# EAGLE board mbedshield060_P (EAGLE 6.5.0)
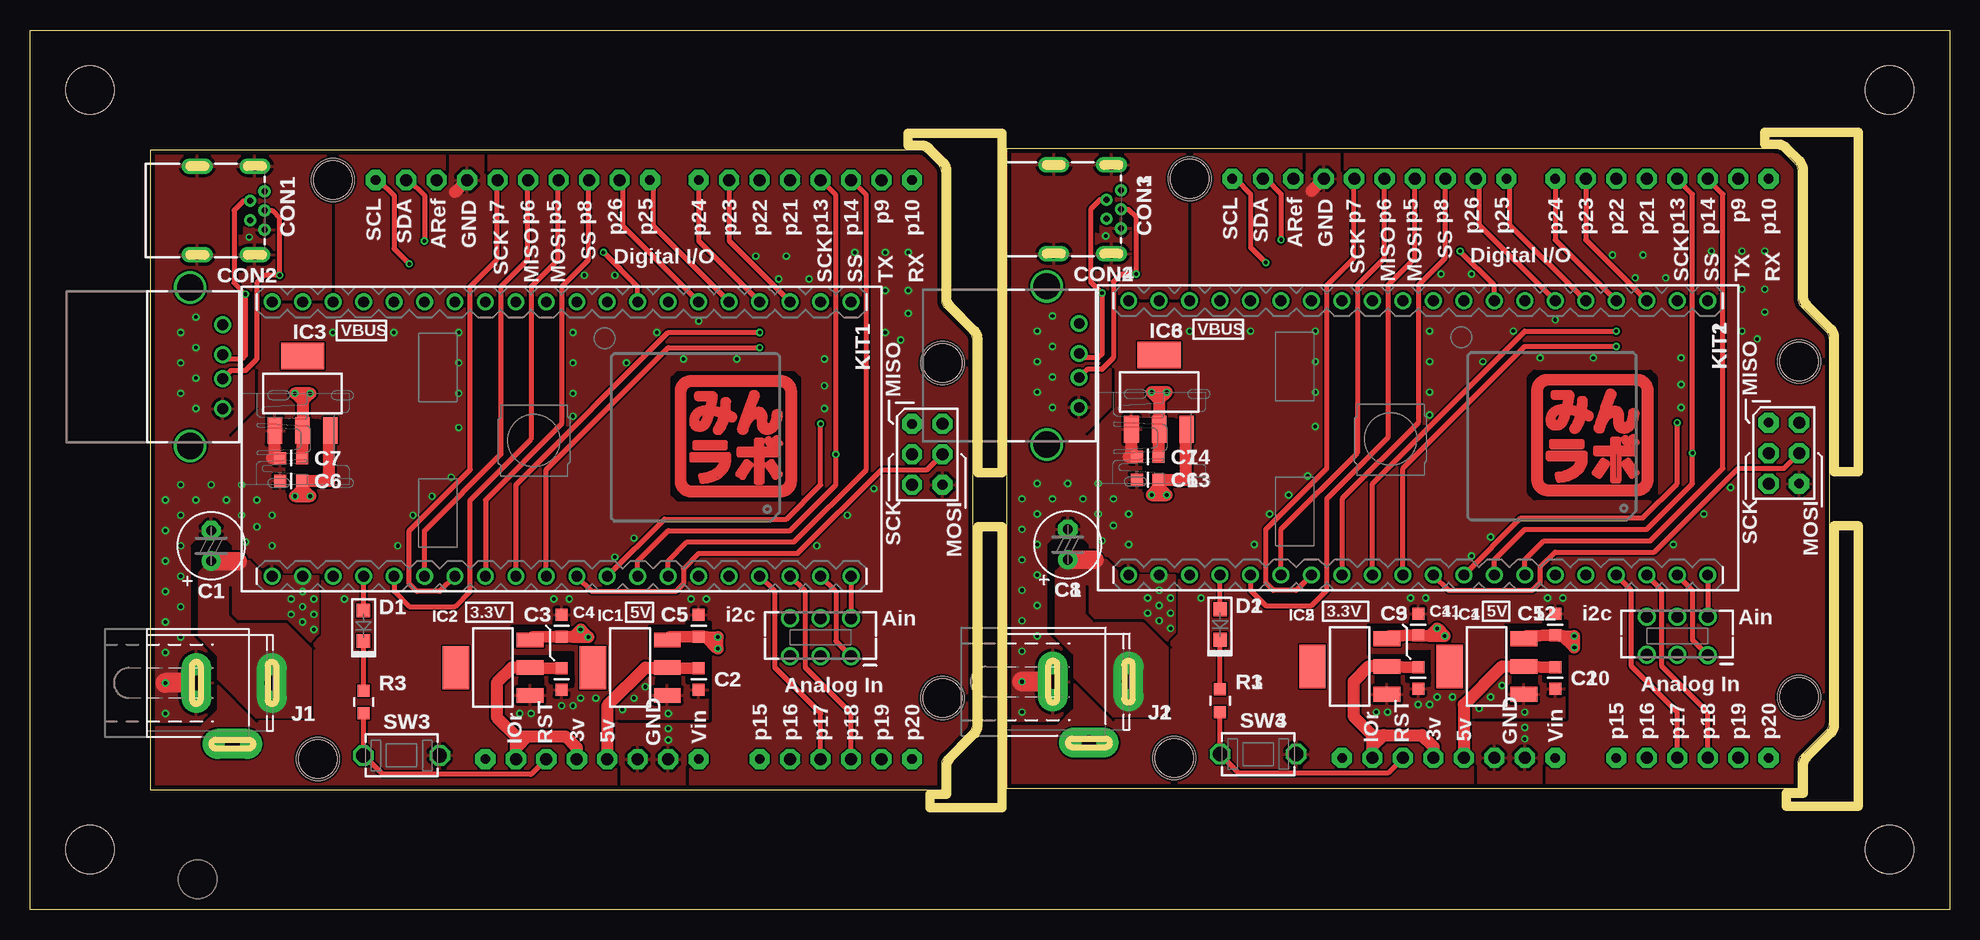
[diagram p0: board, top side]
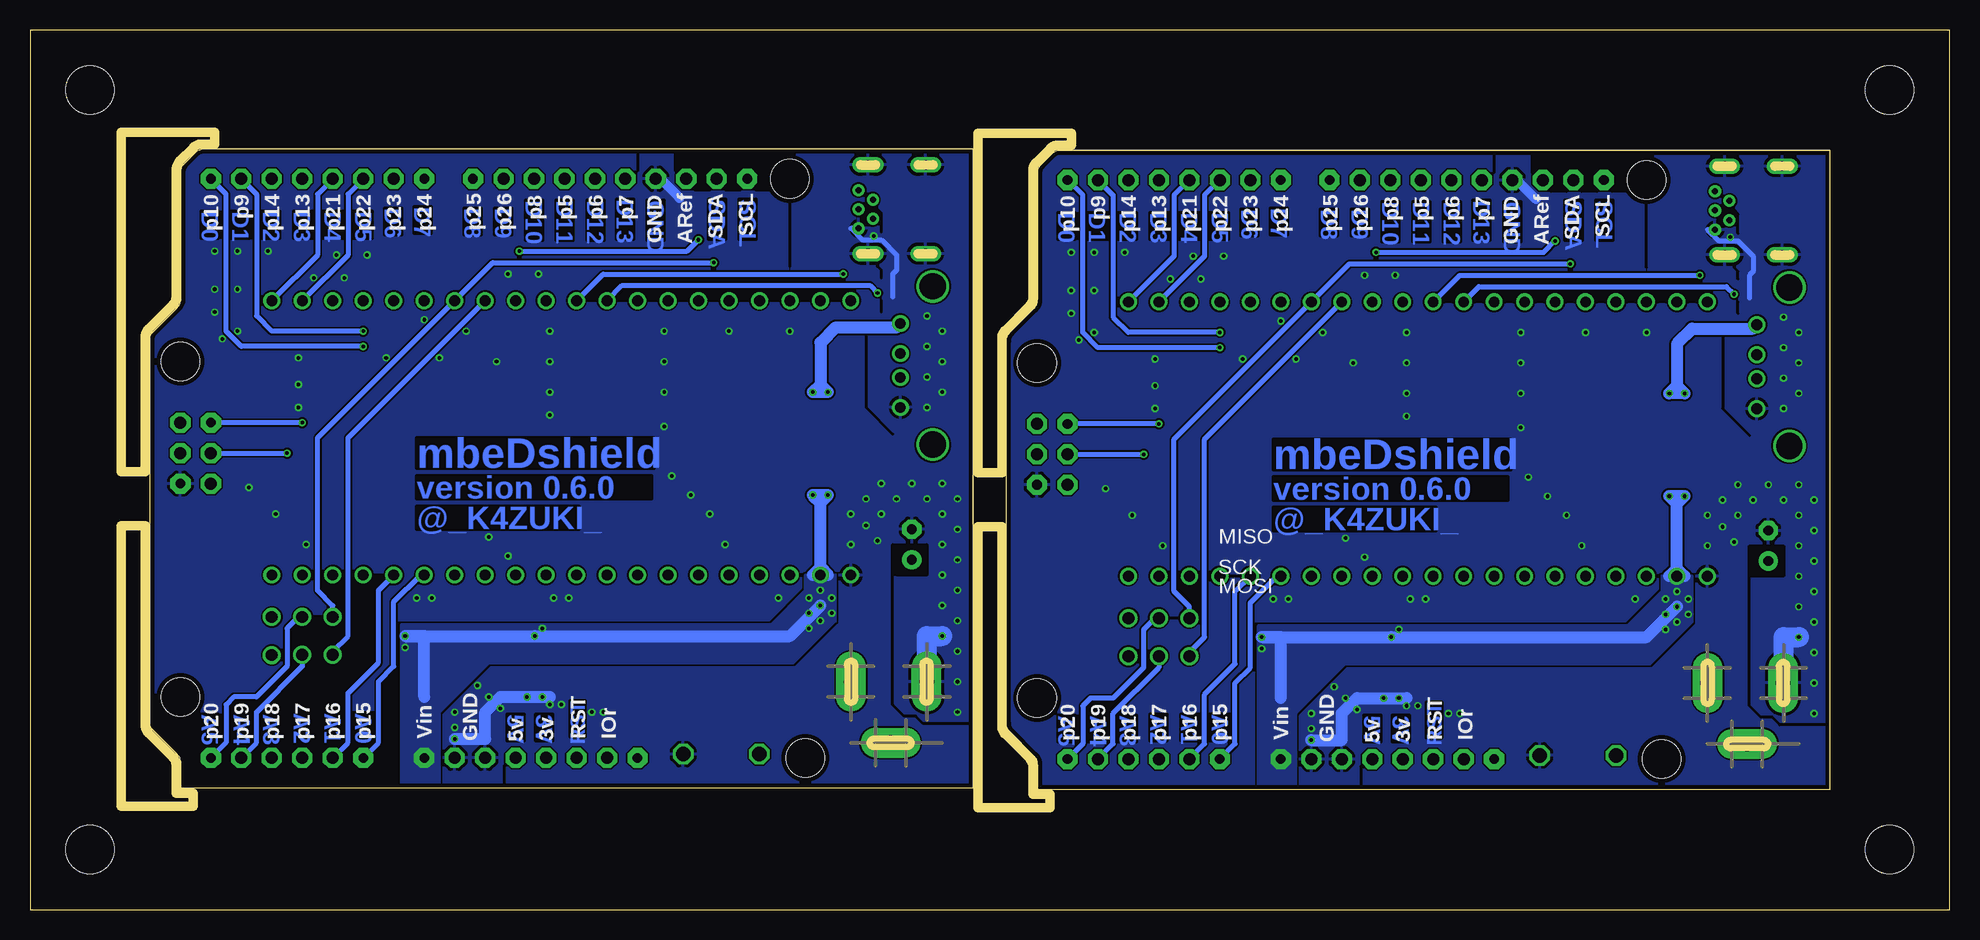
[diagram p1: board, bottom side, seen from below]

Size 160 x 73.3 mm. Coordinates in mm from the lower left corner, seen from the top.
Outline: 0,0 0,73.3 160,73.3 160,0 0,0
Outline: 10,63.3 10,10 76,10 76,12.09 arc-45 76.29,12.79 78.31,14.81 arc45 78.6,15.51 78.6,47.39 arc45 78.31,48.09 76.29,50.11 arc-45 76,50.81 76,61.39 arc45 75.71,62.09 74.79,63.01 arc45 74.09,63.3 10,63.3
Outline: 81.4,63.4 81.4,10.1 147.4,10.1 147.4,12.19 arc-45 147.69,12.89 149.71,14.91 arc45 150,15.61 150,47.49 arc45 149.71,48.19 147.69,50.21 arc-45 147.4,50.91 147.4,61.49 arc45 147.11,62.19 146.19,63.11 arc45 145.49,63.4 81.4,63.4
Copper layers (1*16): Top 0.0356mm / dielectric 1.5011mm / Bottom 0.0356mm
Design rules "default *": minimum track width 0.15mm, minimum drill 0.3mm, track to track 0.15mm, track to pad 0.15mm, pad to pad 0.15mm, via to via 0.15mm, smd to smd 0mil, copper to edge 15mil, drill to drill 8mil, minimum pad ring 10mil, minimum via ring 0.15mm, stop-mask expansion 4mil, vias tented up to drill 100mil, thermal gap 10mil
Net classes: 0 signal: width 0.406 mm, drill 0.3 mm; 1 power: width 0.254 mm, drill 0.3 mm
Holes 3.2 mm at 76.06,45.56 76.06,17.62 23.99,12.54 25.26,60.8 147.46,45.66 147.46,17.72 95.39,12.64 96.66,60.9
Holes 4 mm at 5,68.3 5,5 155,5 155,68.3
tRestrict: area 43.4,18.9 to 45.3,19.5; area 54.8,18.9 to 56.7,19.5; area 40.8,18.9 to 42.7,19.2; area 52.2,18.9 to 54.2,19.2; area 54.8,23.3 to 56.7,24; area 43.7,23.3 to 44.9,24; area 21.4,38.9 to 21.8,40.8; area 23.7,38.9 to 24,40.8; area 21.4,36.7 to 22.1,38.6; area 21.4,34.8 to 22.1,36.7; area 114.8,19 to 116.7,19.6; area 126.2,19 to 128.1,19.6; 8 more areas; 80 lines
bRestrict: 72 lines
Milling: area 75,8.5 to 81,31.9; area 73.2,36.4 to 81,64.7; area 146.4,8.6 to 152.4,32; area 144.6,36.5 to 152.4,64.8

## Footprints (pad centres in the part's own frame; a part is rotated, then mirrored left to right if it is on the bottom)
C_2.5PHI6 = drill 0.813 pad 1.6: + -1.27,0 | drill 0.813 pad 1.6 octagon: - 1.27,0
CR_1608 = smd 1 x 1: 1 -0.9,0; 2 0.9,0
CON_USB_MINIB_AKI = drill 0.5: D+ 0,0; D- -1.2,0.8; GND 0,-1.6; ID -1.2,-0.8; VBUS 0,1.6 | drill 0.8 long: GND@1 -5.6,3.7; GND@2 -0.8,3.7; GND@3 -0.8,-3.7; GND@4 -5.6,-3.7
CON_USB_A_SHIELD = drill 0.9: 1 -3.5,0; 2 -1,0; 3 1,0; 4 3.5,0 | drill 2.2: SHLD -6.6,-2.7; SHLD@1 6.6,-2.7
DIODE_2125 = smd 1.143 x 1.143: A 1.27,0; K -1.27,0
SOT223 = smd 1.219 x 2.235: 1 -2.311,-3.099; 2 0,-3.099; 3 2.311,-3.099 | smd 3.6 x 2.2: 4 0,3.099
CON_DCJACK = drill 1.2 pad 2.5 long: 1 -0.6,0; 2 2.405,-5.08; 3 5.7,0
MBED-KIT = drill 0.9: D+ 11.43,1.27; D- 11.43,3.81; GND -11.43,24.13; IF+ 11.43,16.51; IF- 11.43,19.05; NR -11.43,16.51; P$5 -11.43,13.97; P$6 -11.43,11.43; P$7 -11.43,8.89; P$8 -11.43,6.35; P$9 -11.43,3.81; P$10 -11.43,1.27; P$11 -11.43,-1.27; P$12 -11.43,-3.81; P$13 -11.43,-6.35; P$14 -11.43,-8.89; P$15 -11.43,-11.43; P$16 -11.43,-13.97; P$17 -11.43,-16.51; P$18 -11.43,-19.05; P$19 -11.43,-21.59; P$20 -11.43,-24.13; P$21 11.43,-24.13; P$22 11.43,-21.59; P$23 11.43,-19.05; P$24 11.43,-16.51; P$25 11.43,-13.97; P$26 11.43,-11.43; P$27 11.43,-8.89; P$28 11.43,-6.35; P$29 11.43,-3.81; P$30 11.43,-1.27; RD+ 11.43,11.43; RD- 11.43,13.97; TD+ 11.43,6.35; TD- 11.43,8.89; VB -11.43,19.05; VIN -11.43,21.59; VOUT 11.43,24.13; VU 11.43,21.59
R_1608_PADPAD = smd 1 x 1: 1 -0.953,0; 2 0.953,0
SW_SLIDE_2X2_1 = drill 0.991: 1.1 -2.54,1.587; 1.2 -2.54,-1.587; 2.1 2.54,1.575; 2.2 2.54,-1.587; COM.1 0,1.575; COM.2 0,-1.587
SW_TACTSW_P8073 = drill 1.2 octagon: A1 -3.175,0; A2 3.175,0
BOARD_MBEDSHIELD3 = drill 1 pad 1.676 octagon: 3V 35.56,2.54; 5V 38.1,2.54; A1 53.34,2.54; A2 55.88,2.54; A3 58.42,2.54; A4 60.96,2.54; AREF 23.876,50.8; D1 60.96,50.8; D2 58.42,50.8; D3 55.88,50.8; D4 53.34,50.8; D5 50.8,50.8; D6 48.26,50.8; D9 39.116,50.8; D10 36.576,50.8; D11 34.036,50.8; D12 31.496,50.8; D13 28.956,50.8; D15 66.04,30.48; D18 63.5,25.4; GND 26.416,50.8; GND1 43.18,2.54; GND2 40.64,2.54; IOREF 30.48,2.54; P11 66.04,27.94; P13 63.5,27.94; RESET 33.02,2.54; SDA 21.336,50.8 | drill 0.8 pad 1.676 octagon: A0 50.8,2.54; A5 63.5,2.54; D0 63.5,50.8; D7 45.72,50.8; D8 41.656,50.8; GND3 66.04,25.4; P12 63.5,30.48; RESERVED 27.94,2.54; SCL 18.796,50.8; VIN 45.72,2.54

## Placement (x,y rotation side)
C1  P-5002  [C_2.5PHI6]  15.1,30.32 90 top
C2  [CR_1608]  55.74,19.21 270 top
C3  [CR_1608]  44.31,19.21 270 top
C4  [CR_1608]  44.31,23.65 90 top
C5  [CR_1608]  55.74,23.65 90 top
C6  [CR_1608]  21.77,35.72 180 top
C7  [CR_1608]  21.77,37.62 180 top
C8  P-5002  [C_2.5PHI6]  86.5,30.42 90 top
C9  [CR_1608]  115.71,19.31 270 top
C10  [CR_1608]  127.14,19.31 270 top
C11  [CR_1608]  115.71,23.75 90 top
C12  [CR_1608]  127.14,23.75 90 top
C13  [CR_1608]  93.17,35.82 180 top
C14  [CR_1608]  93.17,37.72 180 top
CON1  C-2235  [CON_USB_MINIB_AKI]  19.55,58.26 0 top
CON2  [CON_USB_A_SHIELD]  16.05,45.24 270 top
CON3  C-2235  [CON_USB_MINIB_AKI]  90.94,58.36 0 top
CON4  [CON_USB_A_SHIELD]  87.45,45.34 270 top
D1  I-2073  [DIODE_2125]  27.8,23.65 90 top
D2  I-2073  [DIODE_2125]  99.2,23.75 90 top
I1  ICON_MINLAB_M2  [ICON_MINLAB_2]  53.84,34.45 0 top
I2  ICON_MINLAB_M2  [ICON_MINLAB_2]  125.23,34.55 0 top
IC1  I-2503  [SOT223]  50.02,20.16 90 top
IC2  I-2502  [SOT223]  38.59,20.16 90 top
IC3  I-2503  [SOT223]  22.72,43.02 0 top
IC4  I-2503  [SOT223]  121.42,20.26 90 top
IC5  I-2502  [SOT223]  110,20.26 90 top
IC6  I-2503  [SOT223]  94.12,43.12 0 top
J1  C-6568  [CON_DCJACK]  14.46,18.89 0 top
J2  C-6568  [CON_DCJACK]  85.86,18.99 0 top
KIT1  MBED_NXP_LPC1768  [MBED-KIT]  44.31,39.21 90 top
KIT2  MBED_NXP_LPC1768  [MBED-KIT]  115.71,39.31 90 top
R1  [R_1608_PADPAD]  99.2,17.4 270 top
R3  [R_1608_PADPAD]  27.8,17.3 270 top
SW1  P-2627  [SW_SLIDE_2X2_1]  65.9,22.7 180 top
SW2  P-2627  [SW_SLIDE_2X2_1]  137.3,22.8 180 top
SW3  SW_TACTSW_2PP8073  [SW_TACTSW_P8073]  30.98,12.86 180 top
SW4  SW_TACTSW_2PP8073  [SW_TACTSW_P8073]  102.38,12.96 180 top
U$1  mbeDshield060  [BOARD_MBEDSHIELD3]  10.02,10 0 top
U$2  mbeDshield060  [BOARD_MBEDSHIELD3]  81.42,10.1 0 top

## Library data of the parts
C1-C14 CON1-CON4 D1 D2 I1 I2 J1 J2 R1 R3 SW1-SW4 U$1 U$2 = mylib
IC1-IC6 = SparkFun
KIT1 KIT2 = MBED_v2.1

## Nets
3.3V: C3.1 IC2.2 U$1.3V U$1.IOREF
3.3V1: C9.1 IC5.2 U$2.3V U$2.IOREF
5V: C2.1 IC1.2 U$1.5V
5V1: C10.1 IC4.2 U$2.5V
GND [power]: C1.- C2.2 C3.2 C4.2 C5.2 C6.2 C7.2 CON1.GND CON1.GND@1 CON1.GND@2 CON1.GND@3 CON1.GND@4 CON2.4 IC1.1 IC2.1 IC3.1 J1.1 KIT1.GND SW3.A1 U$1.GND U$1.GND1 U$1.GND2 U$1.GND3
GND1 [power]: C8.- C9.2 C10.2 C11.2 C12.2 C13.2 C14.2 CON3.GND CON3.GND@1 CON3.GND@2 CON3.GND@3 CON3.GND@4 CON4.4 IC4.1 IC5.1 IC6.1 J2.1 KIT2.GND SW4.A1 U$2.GND U$2.GND1 U$2.GND2 U$2.GND3
N$1: CON1.D- CON2.2 KIT1.D-
N$3: R1.2 SW4.A2 U$2.RESET
N$4: D2.K R1.1
N$5: CON3.D+ CON4.3 KIT2.D+
N$6: CON3.D- CON4.2 KIT2.D-
N$27: D1.K R3.1
N$28: R3.2 SW3.A2 U$1.RESET
N$45: CON1.D+ CON2.3 KIT1.D+
P1: KIT2.P$15 U$2.A0
P2: KIT2.P$16 U$2.A1
P3: KIT2.P$17 U$2.A2
P4: KIT2.P$18 U$2.A3
P5: KIT1.P$5 U$1.D11
P6: KIT1.P$6 U$1.D12
P7: KIT1.P$7 U$1.D13
P8: KIT1.P$8 U$1.D10
P9: KIT1.P$9 U$1.D1
P10: KIT1.P$10 U$1.D0
P11: KIT1.P$11 U$1.P11
P12: KIT1.P$12 U$1.P12
P13: KIT1.P$13 U$1.D3 U$1.P13
P14: KIT1.P$14 U$1.D2
P15: KIT1.P$15 U$1.A0
P16: KIT1.P$16 U$1.A1
P17: KIT1.P$17 U$1.A2
P18: KIT1.P$18 U$1.A3
P19: KIT1.P$19 SW1.1.1
P20: KIT1.P$20 SW1.1.2
P21: KIT1.P$21 U$1.D4
P22: KIT1.P$22 U$1.D5
P23: KIT1.P$23 U$1.D6
P24: KIT1.P$24 U$1.D7
P25: KIT1.P$25 U$1.D8
P26: KIT1.P$26 U$1.D9
P27: KIT1.P$27 SW1.2.2 U$1.SCL
P27/P1: SW2.COM.2 U$2.A5
P27/P20: SW1.COM.2 U$1.A5
P28: KIT1.P$28 SW1.2.1 U$1.SDA
P28/P1: SW2.COM.1 U$2.A4
P28/P19: SW1.COM.1 U$1.A4
P29: KIT2.P$9 U$2.D1
P30: KIT2.P$27 SW2.2.2 U$2.SCL
P31: KIT2.P$28 SW2.2.1 U$2.SDA
P32: KIT2.P$14 U$2.D2
P33: KIT2.P$13 U$2.D3 U$2.P13
P34: KIT2.P$12 U$2.P12
P35: KIT2.P$11 U$2.P11
P36: KIT2.P$23 U$2.D6
P37: KIT2.P$24 U$2.D7
P38: KIT2.P$25 U$2.D8
P39: KIT2.P$26 U$2.D9
P40: KIT2.P$8 U$2.D10
P41: KIT2.P$5 U$2.D11
P42: KIT2.P$6 U$2.D12
P43: KIT2.P$7 U$2.D13
P44: KIT2.P$10 U$2.D0
P45: KIT2.P$19 SW2.1.1
P46: KIT2.P$20 SW2.1.2
P47: KIT2.P$22 U$2.D5
P48: KIT2.P$21 U$2.D4
RESET: D1.A KIT1.NR
RESET1: D2.A KIT2.NR
VB: KIT1.VB
VB1: KIT2.VB
VBUS: C7.1 CON2.1 IC3.2
VBUS1: C14.1 CON4.1 IC6.2
VIN [power]: C1.+ C4.1 C5.1 C6.1 IC1.3 IC2.3 IC3.3 J1.3 KIT1.VIN U$1.VIN
VIN1 [power]: C8.+ C11.1 C12.1 C13.1 IC4.3 IC5.3 IC6.3 J2.3 KIT2.VIN U$2.VIN
VO: KIT1.VOUT
VO1: KIT2.VOUT
VU: KIT1.VU
VU1: KIT2.VU

## Tracks (layer width: path | path; a pad name or v marks a point on that pad's centre or on a via)
3.3V
  Top 1.016: 40.5,14.45 38.91,16.03 38.91,18.89 40.18,20.16 IC2.2 C3.1 | 40.5,14.45 41.45,14.45 | 41.45,14.45 44.63,14.45 45.58,13.49 U$1.3V | U$1.IOREF 40.5,13.49 | 40.5,13.49 40.5,14.45 | 41.45,14.45 40.5,13.49
3.3V1
  Top 1.016: 111.9,14.54 110.31,16.13 110.31,18.99 111.58,20.26 IC5.2 C9.1 | 111.9,14.54 112.85,14.54 | 112.85,14.54 116.03,14.54 116.98,13.59 U$2.3V | U$2.IOREF 111.9,13.59 | 111.9,13.59 111.9,14.54 | 112.85,14.54 111.9,13.59
5V
  Top 1.016: U$1.5V 48.12,16.98 51.3,20.16 IC1.2 C2.1
5V1
  Top 1.016: U$2.5V 119.52,17.09 122.69,20.26 IC4.2 C10.1
GND  (via drill 0.3)
  Top 0.254: 20.41,37.62 C7.2
  Top 1.016: 35.42,59.78 U$1.GND | 20.18,37.62 20.41,37.62 IC3.1
  Top 1.676: J1.1 v11.29,18.89
  Bottom 0.406: CON1.GND 20.17,56.66 19.23,55.72 17.64,55.72 16.37,54.45 16.37,53.18 16.69,52.86 16.69,50.96
  Bottom 0.813: 36.05,60.8 34.47,59.21
  Bottom 1.016: 45.26,17.62 49.39,17.62 50.66,16.35 50.66,14.13 v53.2,14.13 | 36.37,60.8 36.05,60.8
  Bottom 1.676: J1.1 13.83,22.7 v12.56,22.7
  other vias: 33.52,34.45 35.74,43.02 25.26,48.1 46.22,52.86 12.56,43.02 17.64,35.4 20.18,32.86 30.66,30.32 17.96,30.64 41.77,16.35 53.2,16.35 12.56,45.56 12.56,48.1 11.29,26.51 11.29,23.97 18.27,56.04 50.34,17.62 26.21,25.88 12.56,30.32 12.56,27.78 11.29,29.05 12.56,25.24 11.29,21.43 11.29,16.35 18.91,34.13 17.64,32.86 12.56,35.4 13.83,41.75 13.83,44.29 13.83,46.83 13.83,49.37 31.93,32.86 45.26,45.56 12.56,32.86 11.29,31.59 47.17,17.62 40.82,16.35 44.31,16.98 30.34,48.1 35.74,48.1 45.26,48.1 66.22,45.88 44.95,25.88 56.38,25.88 51.3,18.57 45.9,17.62 55.1,25.88 43.67,25.88 45.26,16.98 18.91,31.91 20.18,30.32 53.2,15.08 11.29,34.13 16.37,34.13 13.83,34.13 15.1,35.4 35.1,36.03 49.39,16.67 35.74,45.56 45.26,43.02 35.74,40.16 45.26,41.12 49.71,45.56 55.74,49.05 58.91,45.88 66.22,41.75 66.22,43.66 65.58,30.32 68.12,32.86 70.34,35.08 48.76,29.37 50.34,30.95 54.47,45.88 52.25,48.1 48.76,52.86 72.57,47.47 73.2,49.69 73.2,51.59 71.3,48.1 71.3,51.59 73.2,54.77 71.3,54.77 68.76,54.77 64.95,52.55 63.04,54.45 62.41,52.55 60.5,54.45
  pour Top (rank 3): 10.02,63.34 78.6,63.34 78.6,10 10.02,10
  pour Bottom (rank 6): 10.02,63.34 78.6,63.34 78.6,10 10.02,10
GND1  (via drill 0.3)
  Top 0.254: 91.81,37.72 C14.2
  Top 1.016: 106.82,59.88 U$2.GND | 91.58,37.72 91.81,37.72 IC6.1
  Top 1.676: J2.1 v82.69,18.99
  Bottom 0.406: CON3.GND 91.57,56.76 90.63,55.82 89.04,55.82 87.77,54.55 87.77,53.28 88.09,52.96 88.09,51.06
  Bottom 0.813: 107.45,60.9 105.87,59.31
  Bottom 1.016: 116.66,17.72 120.79,17.72 122.06,16.45 122.06,14.23 v124.6,14.23 | 107.77,60.9 107.45,60.9
  Bottom 1.676: J2.1 85.23,22.8 v83.96,22.8
  other vias: 104.92,34.55 107.14,43.12 96.66,48.2 117.61,52.96 83.96,43.12 89.04,35.5 91.58,32.96 102.06,30.42 89.36,30.74 113.17,16.45 124.6,16.45 83.96,45.66 83.96,48.2 82.69,26.61 82.69,24.07 89.67,56.14 121.74,17.72 97.61,25.98 83.96,30.42 83.96,27.88 82.69,29.15 83.96,25.34 82.69,21.53 82.69,16.45 90.31,34.23 89.04,32.96 83.96,35.5 85.23,41.85 85.23,44.39 85.23,46.93 85.23,49.47 103.33,32.96 116.66,45.66 83.96,32.96 82.69,31.69 118.57,17.72 112.22,16.45 115.71,17.09 101.74,48.2 107.14,48.2 116.66,48.2 137.62,45.98 116.34,25.98 127.78,25.98 122.69,18.67 117.3,17.72 126.5,25.98 115.08,25.98 116.66,17.09 90.31,32.01 91.58,30.42 124.6,15.18 82.69,34.23 87.77,34.23 85.23,34.23 86.5,35.5 106.5,36.13 120.79,16.77 107.14,45.66 116.66,43.12 107.14,40.26 116.66,41.22 121.11,45.66 127.14,49.15 130.31,45.98 137.62,41.85 137.62,43.76 136.98,30.42 139.52,32.96 141.75,35.18 120.16,29.47 121.74,31.05 125.87,45.98 123.65,48.2 120.16,52.96 143.97,47.56 144.6,49.79 144.6,51.69 142.7,48.2 142.7,51.69 144.6,54.87 142.7,54.87 140.16,54.87 136.35,52.65 134.44,54.55 133.81,52.65 131.9,54.55
  pour Top (rank 3): 81.42,63.44 150,63.44 150,10.1 81.42,10.1
  pour Bottom (rank 6): 81.42,63.44 150,63.44 150,10.1 81.42,10.1
N$1  (via drill 0.3)
  Top 0.406: CON1.D- 17.8,59.06 17,58.26 17,52.23 v17.96,51.27 17.96,46.2 17.64,45.88 16.42,45.88 CON2.2
  Bottom 0.406: KIT1.D- 39.23,51.91 18.59,51.91 v17.96,51.27
N$3
  Top 0.406: U$2.RESET 113.17,11.37 100.79,11.37 SW4.A2 R1.2
N$4
  Top 0.406: R1.1 D2.K
N$5  (via drill 0.3)
  Top 0.406: CON3.D+ 91.58,58.36 92.22,57.73 v92.22,52.96 90.94,52.96 90.31,52.33 90.31,45.98 89.36,45.02 88.14,45.02 CON4.3
  Bottom 0.406: KIT2.D+ 112.22,52.96 v92.22,52.96
N$6  (via drill 0.3)
  Top 0.406: CON3.D- 89.2,59.16 88.41,58.36 88.41,52.33 v89.36,51.38 89.36,46.3 89.04,45.98 87.82,45.98 CON4.2
  Bottom 0.406: KIT2.D- 110.63,52.01 89.99,52.01 v89.36,51.38
N$27
  Top 0.406: R3.1 D1.K
N$28
  Top 0.406: U$1.RESET 41.77,11.27 29.39,11.27 SW3.A2 R3.2
N$45  (via drill 0.3)
  Top 0.406: CON1.D+ 20.18,58.26 20.82,57.62 v20.82,52.86 19.55,52.86 18.91,52.23 18.91,45.88 17.96,44.92 16.73,44.92 CON2.3
  Bottom 0.406: KIT1.D+ 40.82,52.86 v20.82,52.86
P1
  Bottom 0.406: KIT2.P$15 127.46,27.88 129.68,25.66 129.68,20.26 130.95,18.99 130.95,13.91 U$2.A0
P2
  Bottom 0.406: KIT2.P$16 130.95,26.61 130.95,20.58 133.49,18.04 133.49,13.91 U$2.A1
P3
  Top 0.406: KIT2.P$17 133.49,26.61 133.49,20.26 137.3,16.45 U$2.A2
P4
  Top 0.406: KIT2.P$18 136.03,26.61 136.03,20.26 139.84,16.45 U$2.A3
P5
  Top 0.406: KIT1.P$5 30.34,26.51 31.61,25.24 35.42,25.24 36.69,26.51 36.69,34.13 41.77,39.21 41.77,51.91 43.99,54.13 43.99,60.8 U$1.D11
P6
  Top 0.406: KIT1.P$6 32.88,31.59 39.23,37.94 39.23,51.91 41.45,54.13 41.45,60.8 U$1.D12
P7
  Top 0.406: KIT1.P$7 34.15,26.51 32.24,26.51 31.61,27.14 31.61,31.59 36.69,36.67 36.69,51.91 38.91,54.13 38.91,60.8 U$1.D13
P8
  Top 0.406: KIT1.P$8 37.96,34.13 44.31,40.48 44.31,51.91 46.53,54.13 46.53,60.8 U$1.D10
P9  (via drill 0.3)
  Top 0.406: KIT1.P$9 40.5,35.4 53.2,48.1 v60.82,48.1
  Bottom 0.406: U$1.D1 69.71,59.53 69.71,49.37 68.44,48.1 v60.82,48.1
P10  (via drill 0.3)
  Top 0.406: KIT1.P$10 43.04,36.67 53.2,46.83 v60.82,46.83
  Bottom 0.406: v60.82,46.83 70.98,46.83 72.25,48.1 72.25,59.53 U$1.D0
P11
  Top 0.406: KIT1.P$11 46.85,26.51 53.84,26.51 54.47,27.14 54.47,28.41 55.74,29.68 63.99,29.68 70.98,36.67 74.79,36.67 U$1.P11
P12  (via drill 0.3)
  Top 0.406: KIT1.P$12 52.88,32.54 63.04,32.54 65.9,35.4 v65.9,40.48
  Bottom 0.406: v65.9,40.48 U$1.P12
P13  (via drill 0.3)
  Top 0.406: U$1.D3 67.17,59.53 v67.17,37.94 67.17,35.4 63.36,31.59 53.2,31.59 50.66,29.05 KIT1.P$13
  Bottom 0.406: U$1.P13 v67.17,37.94
P14
  Top 0.406: U$1.D2 69.71,59.53 69.71,36.67 63.68,30.64 54.79,30.64 53.2,29.05 KIT1.P$14
P15
  Bottom 0.406: KIT1.P$15 56.06,27.78 58.28,25.56 58.28,20.16 59.55,18.89 59.55,13.81 U$1.A0
P16
  Bottom 0.406: KIT1.P$16 59.55,26.51 59.55,20.48 62.09,17.94 62.09,13.81 U$1.A1
P17
  Top 0.406: KIT1.P$17 62.09,26.51 62.09,20.16 65.9,16.35 U$1.A2
P18
  Top 0.406: KIT1.P$18 64.63,26.51 64.63,20.16 68.44,16.35 U$1.A3
P19
  Top 0.406: KIT1.P$19 67.17,26.51 67.17,22.38 SW1.1.1
P20
  Top 0.406: KIT1.P$20 SW1.1.2
P21
  Bottom 0.406: U$1.D4 64.63,59.53 64.63,54.45 KIT1.P$21
P22
  Bottom 0.406: U$1.D5 62.09,59.53 62.09,54.45 KIT1.P$22
P23
  Top 0.406: U$1.D6 58.28,55.72 KIT1.P$23
P24
  Top 0.406: U$1.D7 55.74,55.72 KIT1.P$24
P25
  Top 0.406: U$1.D8 51.93,60.55 51.93,56.99 KIT1.P$25
P26
  Top 0.406: U$1.D9 49.39,60.55 49.39,56.99 KIT1.P$26
P27  (via drill 0.3)
  Top 0.406: U$1.SCL 29.07,60.8 30.34,59.53 30.34,55.09 v31.61,53.81
  Bottom 0.406: SW1.2.2 63.36,25.24 64.63,26.51 64.63,39.21 KIT1.P$27 50.02,53.81 v31.61,53.81
P27/P1
  Bottom 0.406: SW2.COM.2 137.62,24.39 138.57,23.43 138.57,20.26 141.11,17.72 143.01,17.72 143.65,17.09 143.65,13.91 U$2.A5
P27/P20
  Bottom 0.406: SW1.COM.2 66.22,24.29 67.17,23.34 67.17,20.16 69.71,17.62 71.61,17.62 72.25,16.98 72.25,13.81 U$1.A5
P28  (via drill 0.3)
  Top 0.406: KIT1.P$28 50.66,51.91 v47.8,54.77 | U$1.SDA 31.61,60.8 32.88,59.53 v32.88,55.72
  Bottom 0.406: SW1.2.1 63.36,21.43 62.09,22.7 62.09,39.21 KIT1.P$28 | v47.8,54.77 33.83,54.77 v32.88,55.72
P28/P1
  Bottom 0.406: SW2.COM.1 137.3,20.26 141.11,16.45 141.11,13.91 U$2.A4
P28/P19
  Bottom 0.406: SW1.COM.1 65.9,20.16 69.71,16.35 69.71,13.81 U$1.A4
P29  (via drill 0.3)
  Top 0.406: KIT2.P$9 111.9,35.5 124.6,48.2 v132.22,48.2
  Bottom 0.406: U$2.D1 141.11,59.63 141.11,49.47 139.84,48.2 v132.22,48.2
P30  (via drill 0.3)
  Top 0.406: U$2.SCL 100.47,60.9 101.74,59.63 101.74,55.19 v103.01,53.91
  Bottom 0.406: SW2.2.2 134.76,25.34 136.03,26.61 136.03,39.31 KIT2.P$27 121.42,53.91 v103.01,53.91
P31  (via drill 0.3)
  Top 0.406: KIT2.P$28 122.06,52.01 v119.2,54.87 | U$2.SDA 103.01,60.9 104.28,59.63 v104.28,55.82
  Bottom 0.406: SW2.2.1 134.76,21.53 133.49,22.8 133.49,39.31 KIT2.P$28 | v119.2,54.87 105.23,54.87 v104.28,55.82
P32
  Top 0.406: U$2.D2 141.11,59.63 141.11,36.77 135.08,30.74 126.19,30.74 124.6,29.15 KIT2.P$14
P33  (via drill 0.3)
  Top 0.406: U$2.D3 138.57,59.63 v138.57,38.04 138.57,35.5 134.76,31.69 124.6,31.69 122.06,29.15 KIT2.P$13
  Bottom 0.406: U$2.P13 v138.57,38.04
P34  (via drill 0.3)
  Top 0.406: KIT2.P$12 124.28,32.64 134.44,32.64 137.3,35.5 v137.3,40.58
  Bottom 0.406: v137.3,40.58 U$2.P12
P35
  Top 0.406: KIT2.P$11 118.25,26.61 125.23,26.61 125.87,27.25 125.87,28.52 127.14,29.79 135.4,29.79 142.38,36.77 146.19,36.77 U$2.P11
P36
  Top 0.406: U$2.D6 129.68,55.82 KIT2.P$23
P37
  Top 0.406: U$2.D7 127.14,55.82 KIT2.P$24
P38
  Top 0.406: U$2.D8 123.33,60.65 123.33,57.09 KIT2.P$25
P39
  Top 0.406: U$2.D9 120.79,60.65 120.79,57.09 KIT2.P$26
P40
  Top 0.406: KIT2.P$8 109.36,34.23 115.71,40.58 115.71,52.01 117.93,54.23 117.93,60.9 U$2.D10
P41
  Top 0.406: KIT2.P$5 101.74,26.61 103.01,25.34 106.82,25.34 108.09,26.61 108.09,34.23 113.17,39.31 113.17,52.01 115.39,54.23 115.39,60.9 U$2.D11
P42
  Top 0.406: KIT2.P$6 104.28,31.69 110.63,38.04 110.63,52.01 112.85,54.23 112.85,60.9 U$2.D12
P43
  Top 0.406: KIT2.P$7 105.55,26.61 103.64,26.61 103.01,27.25 103.01,31.69 108.09,36.77 108.09,52.01 110.31,54.23 110.31,60.9 U$2.D13
P44  (via drill 0.3)
  Top 0.406: KIT2.P$10 114.44,36.77 124.6,46.93 v132.22,46.93
  Bottom 0.406: v132.22,46.93 142.38,46.93 143.65,48.2 143.65,59.63 U$2.D0
P45
  Top 0.406: KIT2.P$19 138.57,26.61 138.57,22.48 SW2.1.1
P46
  Top 0.406: KIT2.P$20 SW2.1.2
P47
  Bottom 0.406: U$2.D5 133.49,59.63 133.49,54.55 KIT2.P$22
P48
  Bottom 0.406: U$2.D4 136.03,59.63 136.03,54.55 KIT2.P$21
RESET
  Top 0.406: D1.A KIT1.NR
RESET1
  Top 0.406: D2.A KIT2.NR
VBUS  (via drill 0.3)
  Top 1.016: 22.72,42.38 v22.09,43.02 v23.36,43.02 22.72,42.38 | 22.72,42.38 IC3.2 C7.1
  Bottom 1.016: 22.72,43.66 22.72,47.15 21.45,48.42 16.38,48.42 CON2.1 | 22.72,43.66 v22.09,43.02 v23.36,43.02 22.72,43.66
VBUS1  (via drill 0.3)
  Top 1.016: 94.12,42.48 v93.48,43.12 v94.75,43.12 94.12,42.48 | 94.12,42.48 IC6.2 C14.1
  Bottom 1.016: 94.12,43.76 94.12,47.25 92.85,48.52 87.78,48.52 CON4.1 | 94.12,43.76 v93.48,43.12 v94.75,43.12 94.12,43.76
VIN  (via drill 0.3)
  Top 1.016: 56.38,22.7 C5.1 53.35,22.7 IC1.3 | 56.38,22.7 v57.33,22.7 v57.33,21.75 56.38,22.7 | 45.9,22.7 v46.53,22.7 v45.9,23.34 | 45.9,22.7 45.26,22.7 | 45.26,22.7 C4.1 41.92,22.7 IC2.3 | v45.9,23.34 45.9,22.7 | IC3.3 24.94,39.83 24.94,35.72 C6.1 22.72,35.08 | 22.72,35.08 v22.09,34.45 v23.36,34.45 22.72,35.08 | v45.9,23.34 45.26,22.7
  Top 1.524: 17.32,29.05 C1.+
  Bottom 1.016: 55.74,17.62 55.74,22.7 v57.33,22.7 v46.53,22.7 25.26,22.7 v22.72,25.24 | KIT1.VIN 22.72,28.41 | 22.72,28.41 22.72,33.81 | 22.72,33.81 v22.09,34.45 v23.36,34.45 22.72,33.81 | 22.72,28.41 22.09,27.78 23.36,27.78 22.72,28.41
  other vias: 22.72,26.51 21.77,25.88 21.77,24.61 22.72,23.97 23.67,23.34 23.67,25.88 23.67,24.61
  pour Top (rank 2, no thermals): 14.15,28.1 15.1,29.05 18.27,29.05 19.55,27.78 23.99,27.78 23.99,23.02 23.36,22.38 23.36,16.03 14.15,16.03
  pour Bottom (no thermals): 21.45,27.78 23.99,27.78 23.99,26.51 26.85,23.65 57.65,23.65 57.65,10 54.47,10 54.47,16.35 50.34,20.48 24.94,20.48 21.45,23.97
VIN1  (via drill 0.3)
  Top 1.016: 127.78,22.8 C12.1 124.75,22.8 IC4.3 | 127.78,22.8 v128.73,22.8 v128.73,21.85 127.78,22.8 | 117.3,22.8 v117.93,22.8 v117.3,23.43 | 117.3,22.8 116.66,22.8 | 116.66,22.8 C11.1 113.32,22.8 IC5.3 | v117.3,23.43 117.3,22.8 | IC6.3 96.34,39.93 96.34,35.82 C13.1 94.12,35.18 | 94.12,35.18 v93.48,34.55 v94.75,34.55 94.12,35.18 | v117.3,23.43 116.66,22.8
  Top 1.524: 88.72,29.15 C8.+
  Bottom 1.016: 127.14,17.72 127.14,22.8 v128.73,22.8 v117.93,22.8 96.66,22.8 v94.12,25.34 | KIT2.VIN 94.12,28.52 | 94.12,28.52 94.12,33.91 | 94.12,33.91 v93.48,34.55 v94.75,34.55 94.12,33.91 | 94.12,28.52 93.48,27.88 94.75,27.88 94.12,28.52
  other vias: 94.12,26.61 93.17,25.98 93.17,24.7 94.12,24.07 95.07,23.43 95.07,25.98 95.07,24.7
  pour Top (rank 2, no thermals): 85.55,28.2 86.5,29.15 89.67,29.15 90.94,27.88 95.39,27.88 95.39,23.12 94.75,22.48 94.75,16.13 85.55,16.13
  pour Bottom (no thermals): 92.85,27.88 95.39,27.88 95.39,26.61 98.25,23.75 129.04,23.75 129.04,10.1 125.87,10.1 125.87,16.45 121.74,20.58 96.34,20.58 92.85,24.07

## Text on the board
Bottom: SCL | SDA | GND | D13 | D12 | D11 | D10 | SCL | SDA | GND | D13 | D12 | D11 | D10 | D7 | D9 | D8 | D7 | D6 | D5 | D4 | D3 | D2 | D1 | D0 | D9 | D8 | D6 | D5 | D4 | D3 | D2 | D1 | D0 | mbeDshield | mbeDshield | version 0.6.0 | version 0.6.0 | @_K4ZUKI_ | @_K4ZUKI_ | RST | RST | 3V | 5V | A0 | A1 | A2 | A3 | A4 | A5 | 3V | 5V | A0 | A1 | A2 | A3 | A4 | A5
tPlace: SS | SS | SCK | SCK | MISO | MOSI | SCK | SS | TX | RX | MISO | MOSI | SCK | SS | TX | RX | VBUS | VBUS | MISO | MISO | SCK | SCK | MOSI | MOSI | 3.3V | 5V | i2c | Ain | 3.3V | 5V | i2c | Ain
bPlace: MISO | SCK | MOSI
_tNames: CON1 | CON1 | CON2 | CON2 | IC3 | IC3 | KIT1 | KIT1 | C7 | C7 | C6 | C6 | C1 | C1 | D1 | D1 | IC2 | C3 | C4 | IC1 | C5 | IC2 | C3 | C4 | IC1 | C5 | C2 | C2 | R3 | R3 | J1 | J1 | SW3 | SW3